# EAGLE board OnOnfre_DevBoard (EAGLE 9.1.3)
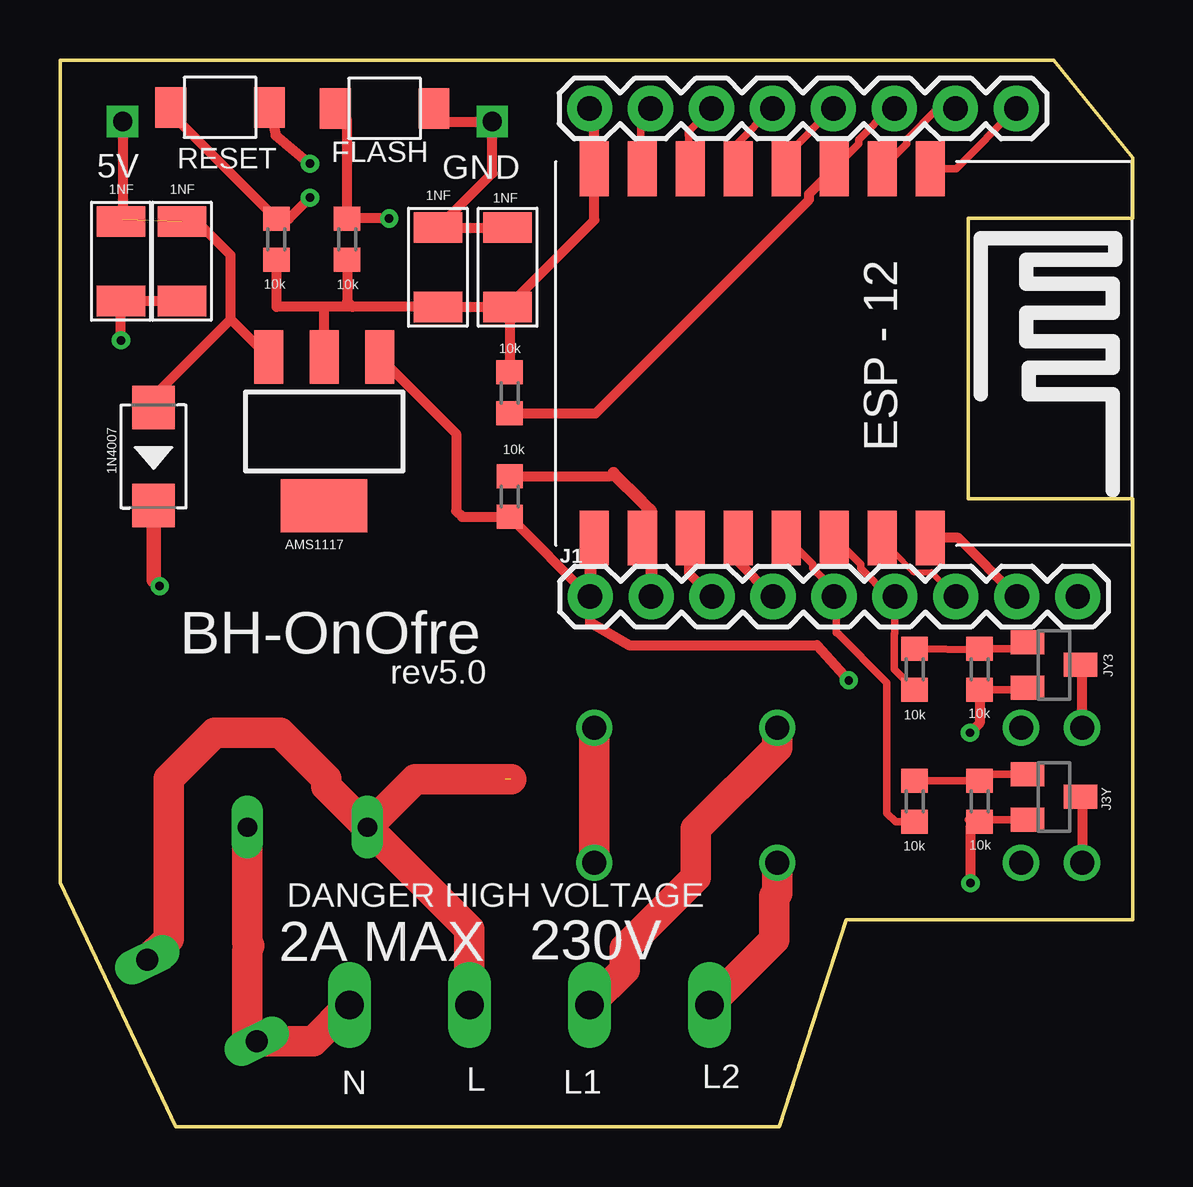
[diagram p0: board, top side]
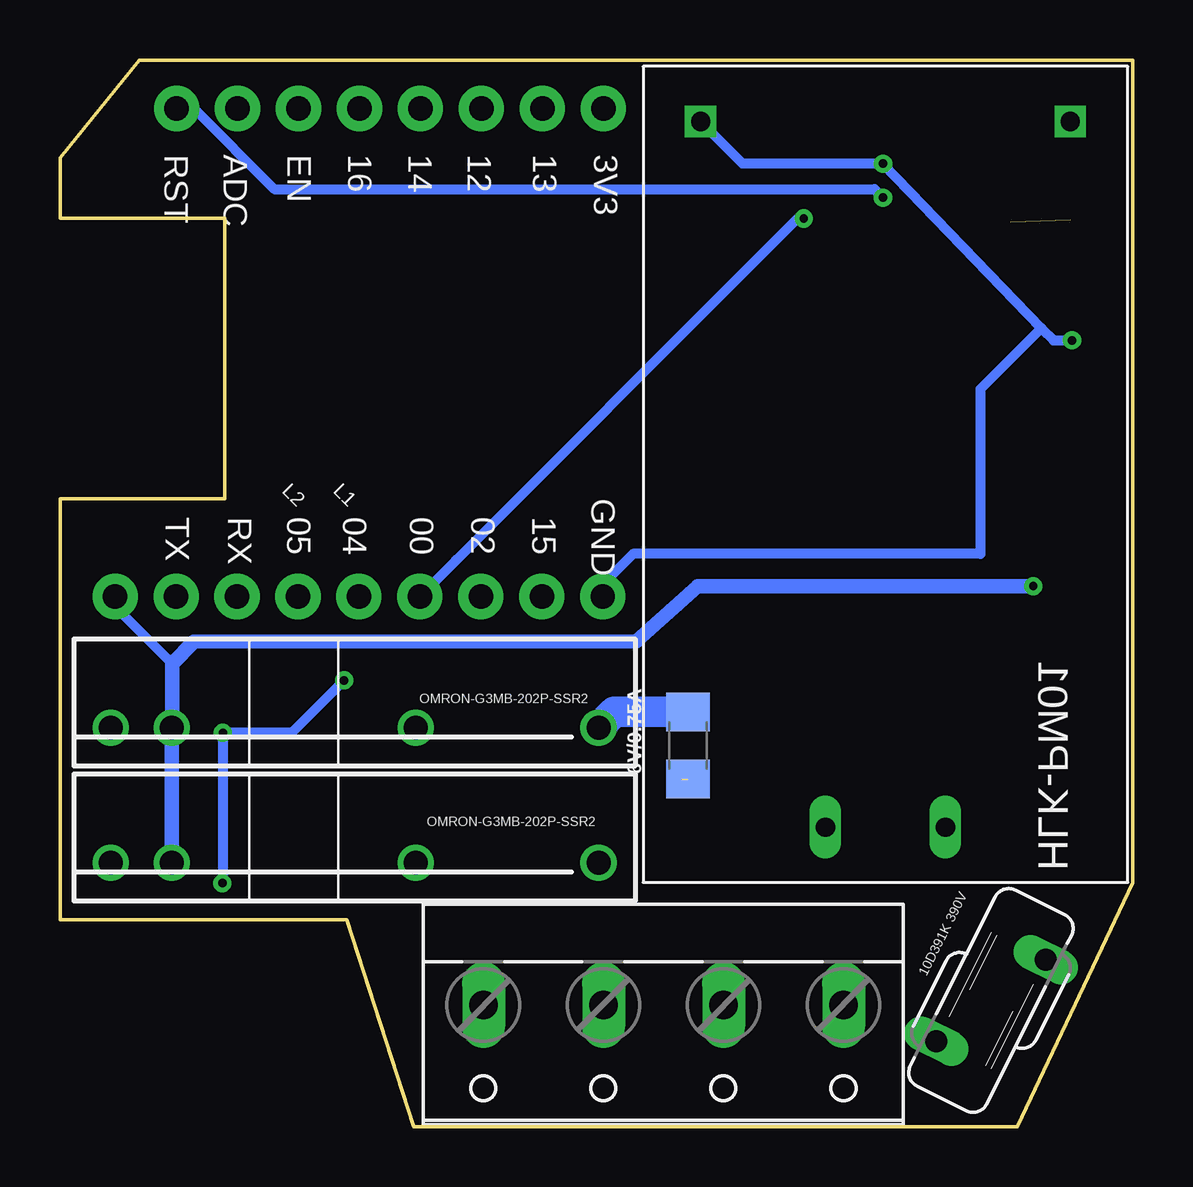
[diagram p1: board, bottom side, seen from below]

Size 44.7 x 44.45 mm. Coordinates in mm from the lower left corner, seen from the top.
Outline: 0.25,44.45 0.51,44.45
Outline: 0.51,44.45 41.4,44.45 44.7,40.39 44.7,37.85 37.85,37.85 37.85,26.16 44.7,26.16 44.7,8.64 32.77,8.64 29.97,0 4.83,0 0,10.16 0,44.45 0.51,44.45
Copper layers (1*16): Top 0.035mm / dielectric 1.5mm / Bottom 0.035mm
Design rules "default": minimum track width 6mil, minimum drill 0.35mm, track to track 6mil, track to pad 6mil, pad to pad 6mil, via to via 6mil, smd to smd 6mil, copper to edge 40mil, drill to drill 6mil, minimum pad ring 10mil, minimum via ring 8mil, stop-mask expansion 4mil, vias tented up to drill 0mil, thermal gap 10mil
Net classes: 1 220V: width 1.27 mm, clearance 2 mm

## Footprints (pad centres in the part's own frame; a part is rotated, then mirrored left to right if it is on the bottom)
SOT223 = smd 1.219 x 2.235: 1 -2.311,-3.099; 2 0,-3.099; 3 2.311,-3.099 | smd 3.6 x 2.2: 4 0,3.099
C1206 = smd 1.27 x 2.032: 1 -1.651,0; 2 1.651,0
DO-214AC = smd 1.8 x 1.77: 1 -2.042,0; 2 2.042,0
1206 = smd 1.6 x 1.8: 1 -1.4,0; 2 1.4,0
B3U-1000P = smd 1.283 x 1.7: 1 -2.056,0; 2 2.056,0
1X09 = drill 1.016 pad 1.88: 1 0,0; 2 2.54,0; 3 5.08,0; 4 7.62,0; 5 10.16,0; 6 12.7,0; 7 15.24,0; 8 17.78,0; 9 20.32,0
SOT23 = smd 1 x 1.4: 1 -0.95,-1.1; 2 0.95,-1.1; 3 0,1.1
1X08 = drill 1.016 pad 1.88: 1 0,0; 2 2.54,0; 3 5.08,0; 4 7.62,0; 5 10.16,0; 6 12.7,0; 7 15.24,0; 8 17.78,0
OMRON-G3MB-202P-SSR = drill 1: 1 -12.7,0; 2 -5.08,0; 3 5.08,0; 4 7.62,0
R0603 = smd 1 x 1.1: 1 -0.85,0; 2 0.85,0
S07K230 = drill 0.914 long: 1 -1.27,-2.54; 2 1.27,2.54
ESP12-SMD = smd 2.286 x 1.2: ADC -7.792,3.8; CH_PD -7.792,1.8; GND 7.592,-8.2; GPIO0 7.592,-2.2; GPIO2 7.592,-4.2; GPIO4 7.592,-0.2; GPIO5 7.592,1.8; GPIO12 -7.792,-4.2; GPIO13 -7.792,-6.2; GPIO14 -7.792,-2.2; GPIO15 7.592,-6.2; GPIO16 -7.792,-0.2; RESET -7.792,5.8; RXD0 7.592,3.8; TXD0 7.592,5.8; VCC -7.792,-8.2
HKLPM01 = drill 0.8 long: P$1 -14.7,2.5; P$2 -14.7,-2.5 | drill 0.8 square: P$3 14.7,7.7; P$4 14.7,-7.7
W237-4 = drill 1.194 long: 1 -7.5,-1.27; 2 -2.5,-1.27; 3 2.5,-1.27; 4 7.5,-1.27

## Placement (x,y rotation side)
AMS1117  LM1117  [SOT223]  11.01,28.97 180 top
C1  1NF  [C1206]  15.75,35.81 90 top
C2  1NF  [C1206]  5.08,36.07 270 top
C3  1NF  [C1206]  2.54,36.07 270 top
C4  1NF  [C1206]  18.65,35.81 90 top
D3  1N4007  [DO-214AC]  3.9,27.93 270 top
F1  6V/0.75A  [1206]  18.54,15.89 90 bottom
FLASH  B3U-1000P-2P-SMD  [B3U-1000P]  13.53,42.43 0 top
J1  [1X09]  22.09,22.09 0 top
J3Y  S8050  [SOT23]  41.41,13.74 270 top
J7  8p  [1X08]  22.07,42.43 0 top
JY3  S8050  [SOT23]  41.41,19.24 270 top
K1  OMRON-G3MB-202P-SSR2  [OMRON-G3MB-202P-SSR]  34.97,11.01 180 bottom
K2  OMRON-G3MB-202P-SSR2  [OMRON-G3MB-202P-SSR]  34.97,16.63 180 bottom
R1  10k  [R0603]  35.61,19.06 90 top
R2  10k  [R0603]  38.32,19.06 90 top
R3  10k  [R0603]  38.32,13.56 90 top
R4  10k  [R0603]  35.61,13.56 90 top
R5  10D391K 390V  [S07K230]  5.91,5.26 153.3 bottom
R8  10k  [R0603]  11.96,36.98 270 top
R9  10k  [R0603]  18.74,30.58 90 top
R10  10k  [R0603]  9.01,36.98 270 top
R11  10k  [R0603]  18.74,26.26 270 top
RESET  B3U-1000P-2P-SMD  [B3U-1000P]  6.67,42.47 0 top
U2  esp12  [ESP12-SMD]  30.46,32.13 270 top
U$2  HKLPM01  [HKLPM01]  10.31,27.19 90 top
X1  [W237-4]  19.56,3.81 180 bottom

## Library data of the parts
AMS1117 = SparkFun-IC-Power; PROD_ID: VREG-08170
C1-C4 = Seeed-Capacitor; MPN: CC1206KKX7RCBB102
D3 = Seeed-Diode; MPN: 1N4007
F1 = SparkFun-Fuses; PROD_ID: RES-11150
FLASH RESET = switches; DIGIKEY: SW1020CT-ND; MANUFACTURER: Omron; MPN: B3U-1000P
J1 = SparkFun-Connectors
J3Y JY3 = semicon-smd-ipc
J7 = SparkFun-Connectors; PROD_ID: CONN-08438
K1 K2 = Omron G3MB 202p SSR; MPN: S202S02F; OC_FARNELL: 1618475; OC_NEWARK: 14N9588
R1-R4 R8-R11 = resistor
R5 = varistor
U2 = esp8266modules
U$2 = HKLPM01
X1 = con-wago-500; OC_FARNELL: unknown; OC_NEWARK: unknown

## Nets
3V3: AMS1117.2 C1.1 C4.1 J7.1 R8.2 R9.2 R10.2
5V: D3.2 J1.9 K1.3 K2.3
ADC: J7.7 U2.ADC
CH_PD: J7.6 R9.1 U2.CH_PD
GND: AMS1117.1 C1.2 C2.2 C3.2 C4.2 FLASH.2 J1.1 J3Y.2 JY3.2 R2.1 R3.1 R11.2 RESET.2 U2.GND U$2.P$4
GPIO0: FLASH.1 J1.4 R8.1 U2.GPIO0
GPIO02: J1.3 U2.GPIO2
GPIO04: J1.5 R4.1 U2.GPIO4
GPIO05: J1.6 R1.1 U2.GPIO5
GPIO12: J7.3 U2.GPIO12
GPIO13: J7.2 U2.GPIO13
GPIO14: J7.4 U2.GPIO14
GPIO15: J1.2 R11.1 U2.GPIO15
GPIO16: J7.5 U2.GPIO16
LIVE [220V]: F1.1 R5.1 U$2.P$2 X1.2
LIVE_FUSED: F1.2 K1.1 K2.1
LIVE_ONE_OUT [220V]: K2.2 X1.3
LIVE_TWO_OUT [220V]: K1.2 X1.4
N$1: J3Y.3 K1.4
N$2: U2.VCC
N$7: J3Y.1 R3.2 R4.2
N$9: JY3.3 K2.4
N$13: JY3.1 R1.2 R2.2
NEUTRAL [220V]: R5.2 U$2.P$1 X1.1
RESET: J7.8 R10.1 RESET.1 U2.RESET
RX: J1.7 U2.RXD0
TX: J1.8 U2.TXD0
VCC: AMS1117.3 C2.1 C3.1 D3.1 U$2.P$3

## Tracks (layer width: path | path; a pad name or v marks a point on that pad's centre or on a via)
3V3
  Top 0.406: C4.1 22.26,37.77 22.26,42.23 | C4.1 C1.1 12.19,34.16 | C4.1 18.74,34.08 R9.2 | 12.19,34.16 10.92,34.16 | 10.92,34.16 9.02,34.16 R10.2 | R8.2 11.96,34.39 12.19,34.16 | AMS1117.2 11.01,34.08 10.92,34.16
  Top 0.508: J7.1 22.26,42.23
5V  (via drill 0.35)
  Top 0.508: 3.9,22.78 v4.15,22.53
  Top 0.61: D3.2 3.9,22.78
  Bottom 0.406: 40.03,19.29 42.41,21.67 J1.9
  Bottom 0.61: v4.15,22.53 18.13,22.53 20.7,20.22 39.12,20.2 40.03,19.29 40.03,16.65 K2.3 K1.3 | K1.3
ADC
  Top 0.305: U2.ADC 35.28,40.95 35.28,41.13 36.58,42.43 J7.7
CH_PD
  Top 0.305: U2.CH_PD 33.28,40.95 33.28,41.13 34.58,42.43 J7.6
  Top 0.406: U2.CH_PD 31.22,38.87 31.22,38.63 22.32,29.73 R9.1
GND  (via drill 0.35)
  Top 0.305: R2.1 40.45,18.21 JY3.2 | 37.85,12.79 R3.1 38.23,12.79 J3Y.2
  Top 0.406: R2.1 38.32,16.82 v37.92,16.42 | v37.94,10.15 37.94,12.5 R3.1 | v32.86,18.6 31.54,20.07 23.69,20.07 22.09,20.99 22.09,21.84 | C2.2 C3.2 v2.54,32.77 | C4.2 C1.2 18.01,39.73 U$2.P$4 16.13,41.88 FLASH.2 | RESET.2 8.98,41.31 v10.41,40.13 | AMS1117.1 16.51,28.88 16.51,25.65 16.75,25.41 R11.2 22.06,22.1 J1.1
  Top 0.508: U2.GND 22.09,24.36 J1.1 22.09,21.84
  Bottom 0.406: v37.94,10.15 37.92,10.17 v37.92,16.42 35.04,16.42 v32.86,18.6 | 3.81,33.27 v10.41,40.13 16.26,40.13 U$2.P$4 | 3.81,33.27 3.3,32.77 v2.54,32.77 | 3.81,33.27 6.35,30.73 6.35,23.88 20.83,23.88 22.1,22.61 22.09,22.6 J1.1
GPIO0  (via drill 0.35)
  Top 0.305: 28.18,23.62 28.2,23.9 U2.GPIO0
  Top 0.406: J1.4 28.2,23.6 28.2,23.9 | FLASH.1 11.96,41.95 R8.1 11.97,37.85 v13.72,37.85
  Bottom 0.406: 28.19,23.61 J1.4 13.96,37.85 v13.72,37.85
GPIO02
  Top 0.305: 26.18,23.08 26.22,23.87 U2.GPIO2
  Top 0.406: J1.3 26.22,23.04 26.22,23.87
GPIO04
  Top 0.305: R4.1 34.82,12.71 34.46,13.07 34.46,18.51 32.39,20.58 32.35,20.58 32.35,21.84 32.35,22 | U2.GPIO4 31.36,23.44 31.36,23.27 32.35,22.28 32.35,22 | J1.5 32.35,22
GPIO05
  Top 0.305: U2.GPIO5 33.36,23.44 33.36,23.27 34.53,22.1 J1.6 34.79,20.57 34.76,20.54 34.76,19.07 R1.1
GPIO12
  Top 0.305: U2.GPIO12 26.18,41.47 J7.3
GPIO13
  Top 0.305: U2.GPIO13 24.18,42.01 J7.2
GPIO14
  Top 0.305: U2.GPIO14 28.18,40.93 J7.4
GPIO15
  Top 0.305: 24.26,26.04 24.38,25.91 24.38,24.89 24.63,24.65 24.63,24.17 | U2.GPIO15
  Top 0.406: J1.2 24.63,23.88 24.63,24.17 U2.GPIO15 | R11.1 22.93,27.11 23.06,27.24
  Top 0.508: 23.06,27.24 24.26,26.04 | 24.38,25.91 24.63,25.66 24.63,23.88 | U2.GPIO15 24.63,24.17 J1.2
GPIO16
  Top 0.305: U2.GPIO16 30.18,40.39 J7.5
LIVE  (1 unrouted)
  Top 1.27: X1.2 17.06,8.24 U$2.P$2 | U$2.P$2 11.1,14.2 11.1,14.5 9.17,16.43 6.45,16.43 4.52,14.5 4.52,7.84 R5.1 | U$2.P$2 14.8,14.48 18.8,14.48
LIVE_FUSED
  Top 1.27: K2.1 | K2.1 K1.1
  Bottom 1.27: F1.2 21.61,17.29 K2.1
LIVE_ONE_OUT
  Top 1.27: X1.3 23.53,6.55 23.53,7.44 26.5,10.41 26.5,12.41 29.89,15.8 K2.2
LIVE_TWO_OUT
  Top 1.27: K1.2 29.89,9.72 29.77,9.6 29.77,7.79 X1.4
N$1
  Top 0.406: J3Y.3 42.59,13.67 K1.4
N$7
  Top 0.305: J3Y.1 38.43,14.69 38.32,14.58 R3.2 R4.2
N$9
  Top 0.406: K2.4 42.59,19.17 JY3.3
N$13
  Top 0.305: R1.2 38.29,19.89 R2.2 40.25,19.92 JY3.1
NEUTRAL
  Top 1.27: X1.1 10.54,3.56 R5.2 7.81,3.94 7.81,7.32 7.89,7.55 7.81,7.7 U$2.P$1
RESET  (via drill 0.35)
  Top 0.305: U2.RESET 37.33,39.92 J7.8
  Top 0.406: RESET.1 4.87,41.98 R10.1 9.53,37.83 v10.41,38.72
  Bottom 0.406: v10.41,38.72 10.76,39.07 35.77,39.07 39.14,42.43 J7.8
RX
  Top 0.254: U2.RXD0 34.2,24.47 34.2,23.93 34.73,23.93 35.55,23.11 36.31,23.11 J1.7
TX
  Top 0.406: J1.8 37.43,24.54 U2.TXD0
VCC  (1 unrouted)
  Top 0.406: AMS1117.3 7.11,33.65 | 7.11,33.65 7.11,36.32 5.71,37.72 C2.1 | 7.11,33.65 3.9,30.44 D3.1 | U$2.P$3 2.61,37.79 C3.1

## Text on the board
tNames: 5V | GND | BH-OnOfre | rev5.0 | DANGER HIGH VOLTAGE | 2A MAX | 230V | L1 | N | L | L2
bNames: 3V3 | 13 | 12 | 14 | 16 | EN | ADC | RST | GND | L1 | L2 | 15 | 02 | 00 | 04 | 05 | RX | TX